# Altium PCB board.PcbDoc
Units mm, origin at the board's own origin, x right, y up, seen from the top; angles counter-clockwise.
Board outline 123 x 60 mm, 4 copper layers (Top Layer, Mid Layer 1, Mid Layer 2, Bottom Layer), stack 1.17 mm thick; 90 components, 58 nets, 304 pads, 97 vias.
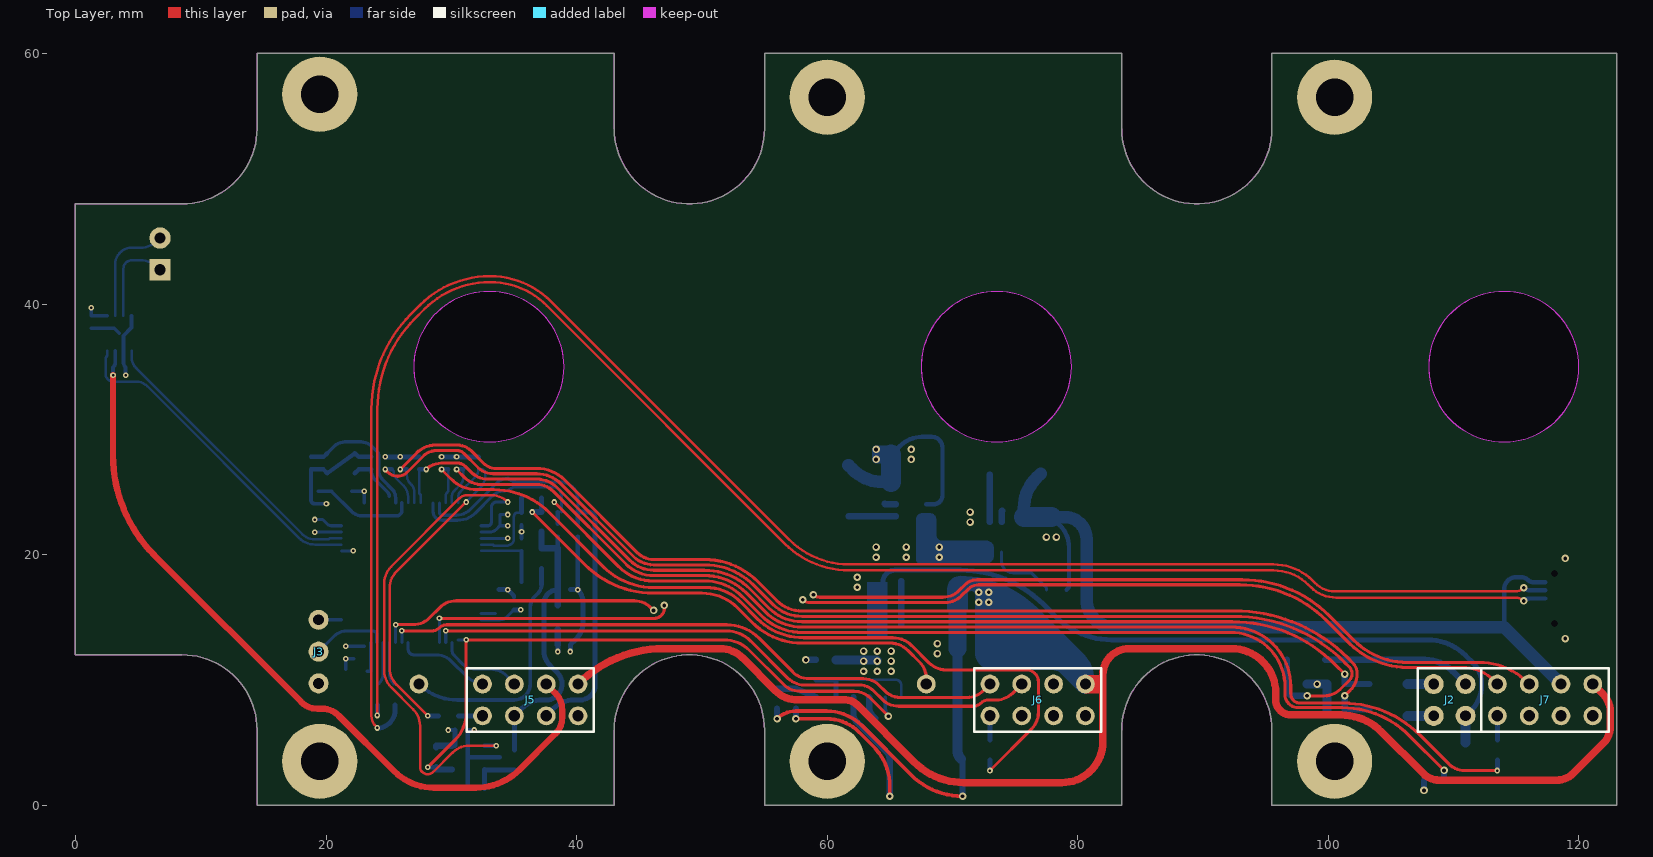
[diagram p0: Top Layer view]
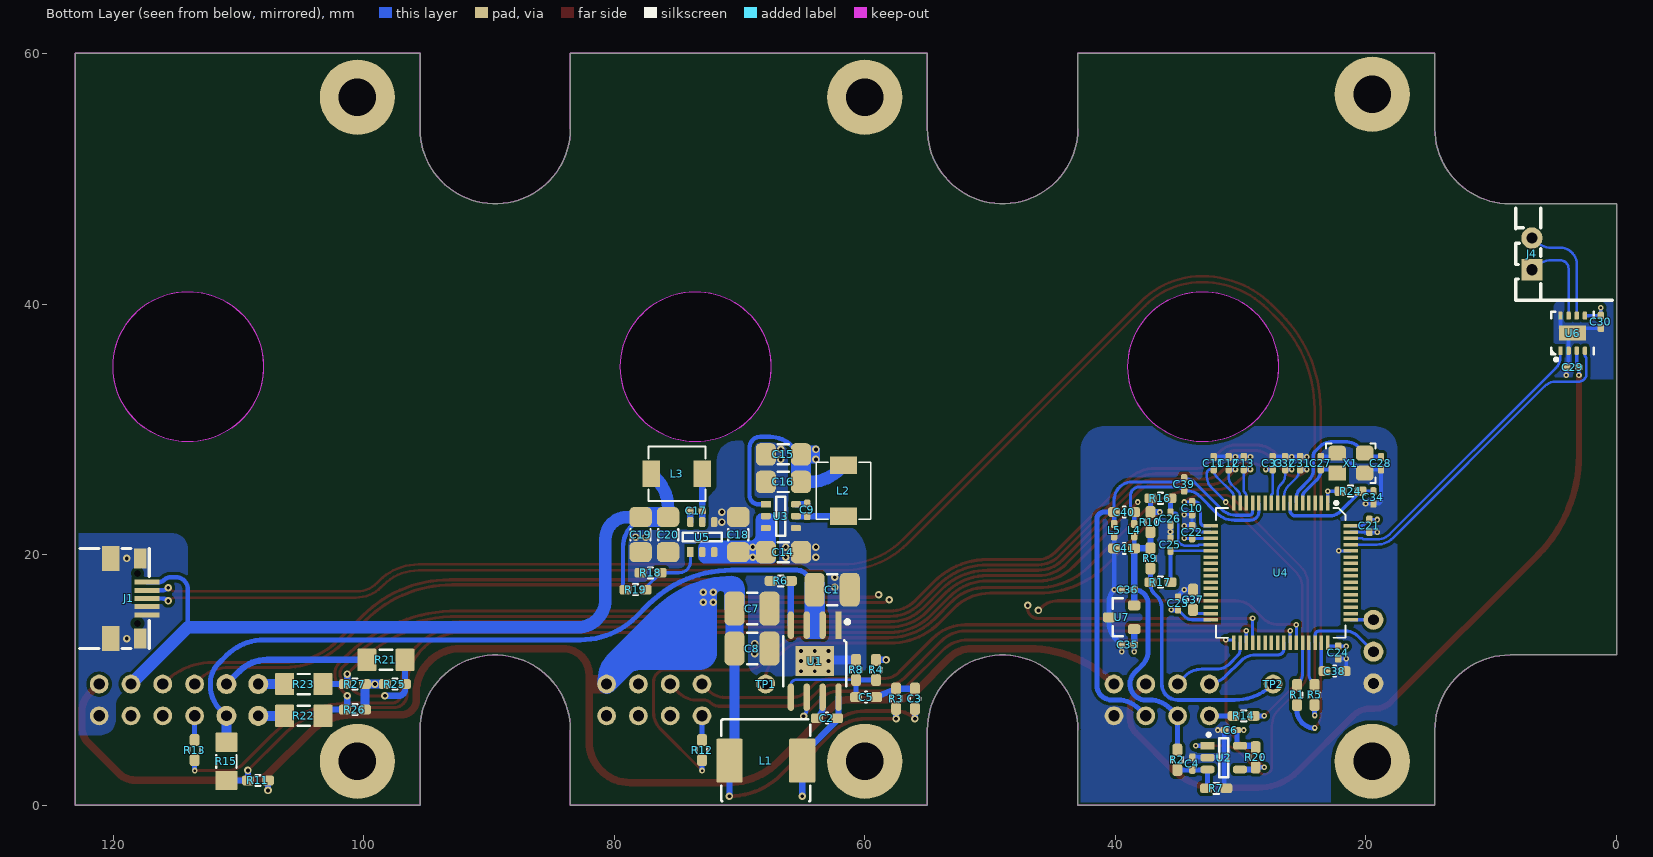
[diagram p1: Bottom Layer view, seen from below]
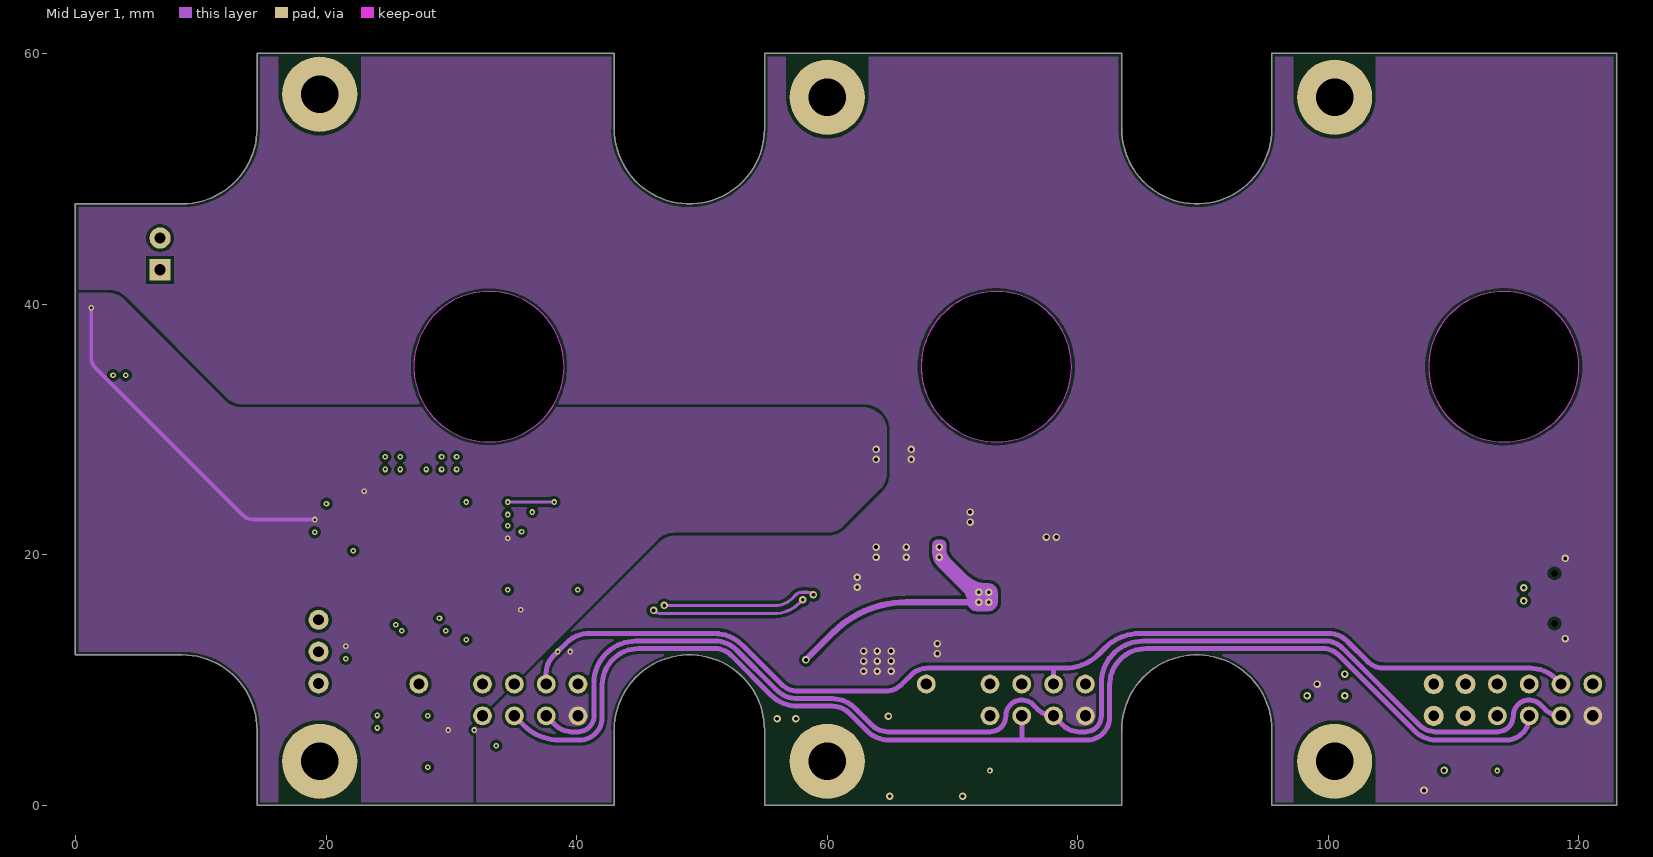
[diagram p2: Mid Layer 1]
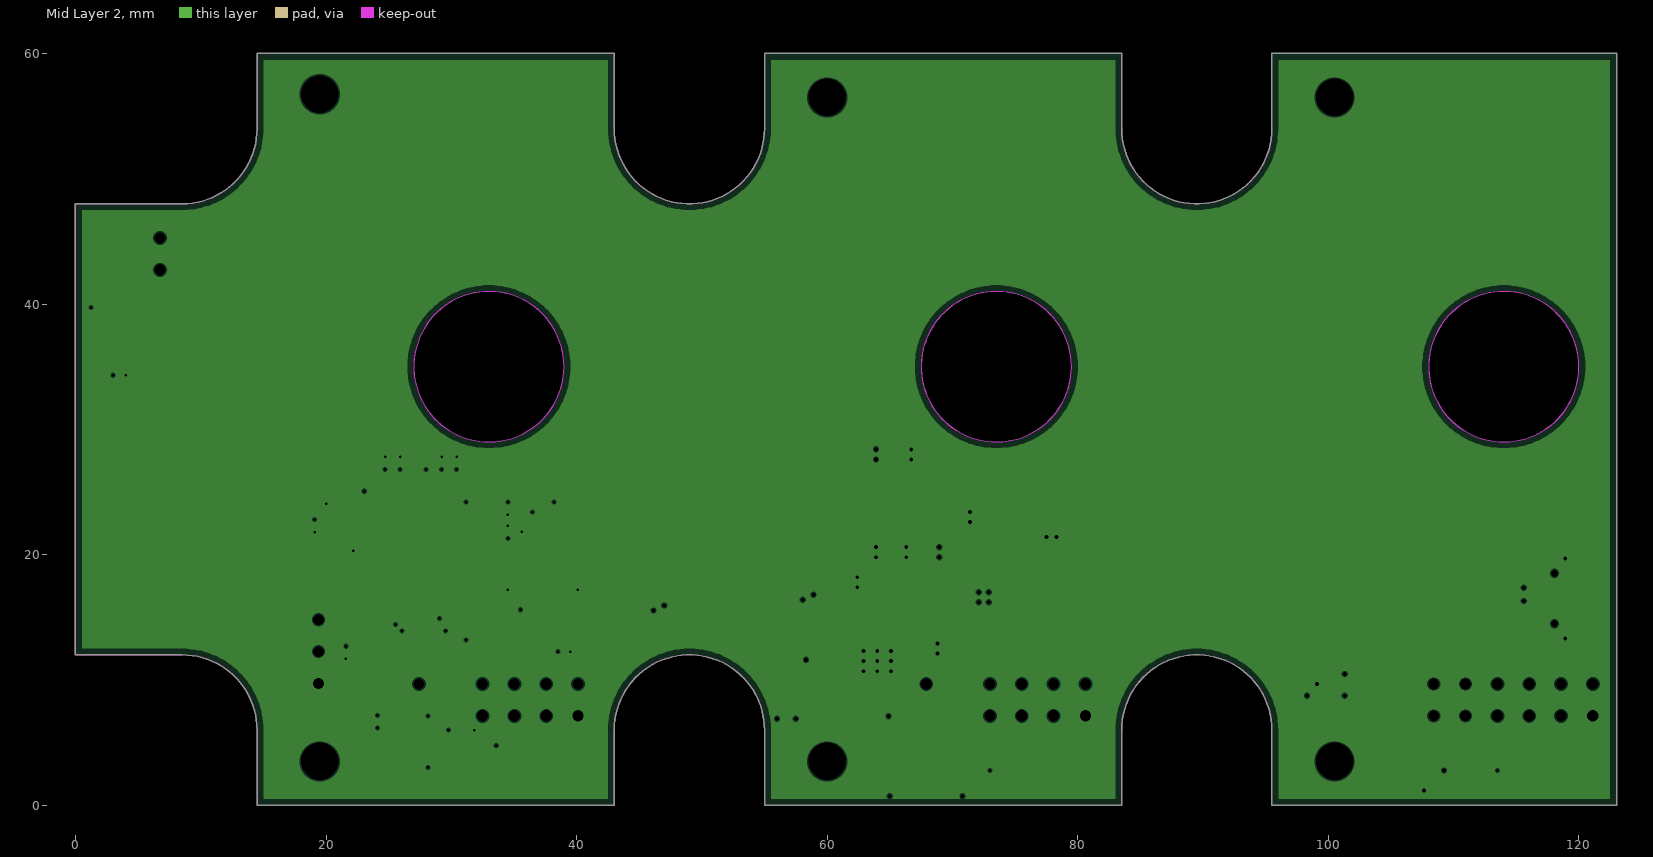
[diagram p3: Mid Layer 2, clearances drawn from the general rule]
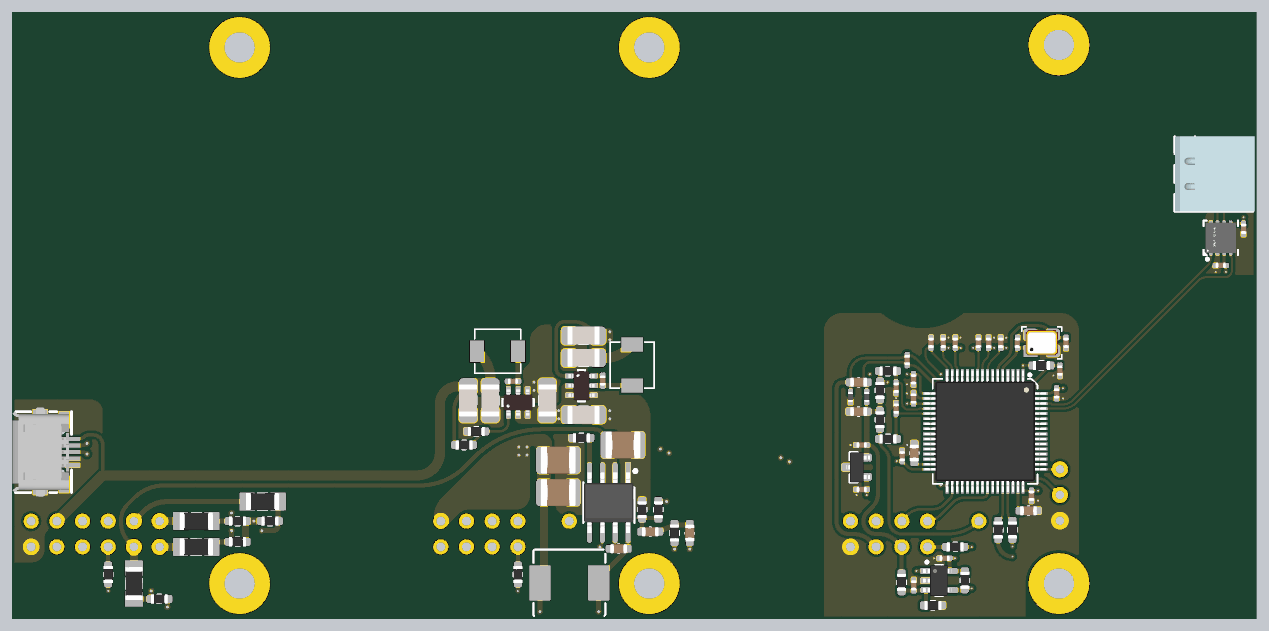
[diagram p4: 3D render of the assembled board from below, using the file's embedded part models]

## Layer stack, top to bottom
Top Solder: solder mask 0.0127, Solder Resist, Dk 3.8
Top Layer: signal copper 0.035
Dielectric 1: prepreg 0.1, 2313, Dk 4.05
Mid Layer 1: signal copper 0.0175
Core: core 0.865, FR-4, Dk 4.5
Mid Layer 2: plane copper 0.0175, net GND
Dielectric 2: prepreg 0.1, 2313, Dk 4.05
Bottom Layer: signal copper 0.035
Bottom Solder: solder mask 0.0127, Solder Resist, Dk 3.8

## Board outline
14.5,6 ccw(c8.5,6) 8.5,12 0,12 0,48 8.5,48 ccw(c8.5,54) 14.5,54 14.5,60 43,60 43,54 ccw(c49,54) 55,54 55,60 83.5,60 83.5,54 ccw(c89.5,54) 95.5,54 95.5,60 123,60 123,0 95.5,0 95.5,6 ccw(c89.5,6) 83.5,6 83.5,0 55,0 55,6 ccw(c49,6) 43,6 43,0 14.5,0
cut-out: 114,41 ccw(c114,35) 108,35 ccw(c114,35) 114,29 ccw(c114,35) 120,35 ccw(c114,35)
cut-out: 73.5,41 ccw(c73.5,35) 67.5,35 ccw(c73.5,35) 73.5,29 ccw(c73.5,35) 79.5,35 ccw(c73.5,35)
cut-out: 33,41 ccw(c33,35) 27,35 ccw(c33,35) 33,29 ccw(c33,35) 39,35 ccw(c33,35)

## Design rules (kind name [scope] priority, off if disabled: settings)
BoardOutlineClearance [All] p1: gap=0.2 ignorepadtopadclearanceinfootprint=FALSE
Clearance [All] p1: gap=0.25 ignorepadtopadclearanceinfootprint=FALSE except(0.102: Arc-Arc Arc-Track Arc-SMDPad Arc-THPad Arc-Text Track-Track Track-SMDPad Track-THPad Track-Text SMDPad-SMDPad SMDPad-THPad SMDPad-Text THPad-THPad THPad-Text Fill-Text Poly-Text Region-Text Text-Text; 0.127: Arc-Via Track-Via SMDPad-Via THPad-Via Via-Via Via-Text)
ComponentClearance [HasFootprint('SWD') or HasFootprint('HDR-2X2')] p1: gap=-1 collisioncheckmode=3 verticalgap=2540 showdistances=TRUE
ComponentClearance ComponentClearance_1 [All] p2: gap=0.4 collisioncheckmode=3 verticalgap=0.102 showdistances=TRUE
DiffPairsRouting [All] p1: maxlimit=0.102 minlimit=0.102 mostfreqgap=0.102 toplayer_minwidth=0.102 toplayer_maxwidth=1816.048 toplayer_prefwidth=0.102 midlayer1_minwidth=0.102 midlayer1_maxwidth=1816.048 midlayer1_prefwidth=0.102 bottomlayer_minwidth=0.102 bottomlayer_maxwidth=1816.048 bottomlayer_prefwidth=0.102 maxuncoupledlength=12.7
Height [All] p1: minheight=0 maxheight=1816.048 prefheight=12.7
HoleSize [All] p1: absolutevalues=TRUE maxlimit=6.3 minlimit=0.2 maxpercent=80.000 minpercent=20.000
HoleToHoleClearance [All] p1: gap=0.25 allowstackedmicrovias=FALSE
MinimumAnnularRing [All] p1: minimumring=0.076
MinimumSolderMaskSliver [All] p1: minsoldermaskwidth=0
PlaneClearance [All] p1: clearance=0.102
PlaneConnect PlaneConnectPowerPads [InPadClass('PowerPads')] p1: planeconnectstyle=Direct reliefexpansion=0.508 reliefentries=4 reliefconductorwidth=0.254 reliefairgap=0.254
PlaneConnect [All] p2: planeconnectstyle=Direct reliefexpansion=0.3 reliefentries=4 reliefconductorwidth=0.102 reliefairgap=0.102
PolygonConnect PolygonConnectPowerPads [All vs (InPadClass('PowerPads'))] p1: connectstyle=Direct reliefconductorwidth=0.254 reliefentries=4 polygonreliefangle="90 Angle" airgapwidth=0.254
PolygonConnect [All] p2: connectstyle=Direct reliefconductorwidth=0.102 reliefentries=4 polygonreliefangle="90 Angle" airgapwidth=0.102
RoutingVias [All] p1: holewidth=0.2 width=0.45 viastyle="Through Hole" minholewidth=0.2 minwidth=0.45 maxholewidth=6.3 maxwidth=6.55
SilkToSilkClearance [All] p1: silktosilkclearance=0
SilkToSolderMaskClearance [IsPad] p1: minsilkscreentomaskgap=0.102 clearancetoexposedcopper=TRUE
SolderMaskExpansion [All] p1: expansion=0.075 istentingtop=FALSE
Width [All] p1: maxlimit=1816.048 minlimit=0.102 preferedwidth=0.102
20 further rules are at their usual default settings.

## Classes and differential pairs
net class R27_Nets: GND NetC33_1
net class C33_Nets: GND NetC33_1
net class C27_Nets: GND NetC27_2
net class R25_Nets: GND NetC31_1
net class C37_Nets: GND NetC37_2
net class C31_Nets: GND NetC31_1
net class U5_Nets: 15V GND NetC17_1 NetC17_2 NetR18_1
net class U3_Nets: 3V3 15V GND NetC9_1 NetC9_2
net class R17_Nets: NetC25_2 NetR9_1
net class R13_Nets: NetC12_1 W_Iout
net class R10_Nets: 3V3_REF NetR10_1
net class R9_Nets: 3V3_REF NetR9_1
net class R4_Nets: 15V NetC5_1
net class R2_Nets: 3V3_REF NetC4_2
net class L4_Nets: 3V3_REF NetC39_2
net class L3_Nets: 5V NetC17_2
net class J4_Nets: NetJ4_1 NetJ4_2
net class C40_Nets: AGND NetC39_2
net class C39_Nets: AGND NetC39_2
net class C38_Nets: GND NetC38_2
net class C41_Nets: 3V3_REF GND
net class C30_Nets: 3V3 GND
net class C13_Nets: GND NetC13_1
net class C12_Nets: GND NetC12_1
net class C11_Nets: GND NetC11_1
net class C6_Nets: 3V3 GND
net class C5_Nets: NetC3_1 NetC5_1
net class C28_Nets: GND NetC28_2
net class TP1_Nets: NetR10_1
net class R22_Nets: NetC32_1 V
net class R18_Nets: GND NetR18_1
net class C36_Nets: 3V3_REF GND
net class C21_Nets: 3V3 GND
net class R8_Nets: GND NetC5_1
net class C29_Nets: 5V GND
net class C26_Nets: GND NetC26_2
net class C14_Nets: 15V GND
net class C10_Nets: GND VB_SNS
net class C4_Nets: GND NetC4_2
net class J2_Nets: NetJ?_1 NetJ?_2 NetJ?_3 NetJ?_4 U V Vb W
net class U1_Nets: BREAK GND NetC2_1 NetC2_2 NetC5_1 NetR6_1 Vb
net class C32_Nets: GND NetC32_1
net class R24_Nets: 3V3 NetC34_2
net class R3_Nets: NetC2_2 NetC3_1
net class L2_Nets: 3V3 NetC9_2
net class J1_Nets: 5V GND NetJ1_2 NetJ1_3
net class R26_Nets: GND NetC32_1
net class C25_Nets: GND NetC25_2
net class C22_Nets: 3V3 GND
net class C9_Nets: NetC9_1 NetC9_2
net class C1_Nets: GND Vb
net class U2_Nets: 3V3 BREAK GND NetC4_2 VB_SNS
net class TP2_Nets: NetR9_1
net class R21_Nets: NetC31_1 U
net class R19_Nets: 5V NetR18_1
net class R16_Nets: NetC26_2 NetR10_1
net class R14_Nets: NetC11_1 U_Iout
net class R20_Nets: 3V3 BREAK
net class R12_Nets: NetC13_1 V_Iout
net class R15_Nets: Vb VB_SNS
net class R23_Nets: NetC33_1 W
net class R11_Nets: GND VB_SNS
net class R7_Nets: GND NetC4_2
net class R5_Nets: DP NetJ1_3
net class R1_Nets: DM NetJ1_2
net class L5_Nets: AGND GND
net class L1_Nets: 15V NetC2_2
net class C15_Nets: 3V3 GND
net class C20_Nets: 5V GND
net class C23_Nets: 3V3 GND
net class C17_Nets: NetC17_1 NetC17_2
net class C16_Nets: 3V3 GND
net class C7_Nets: 15V GND
net class C8_Nets: 15V GND
net class U7_Nets: 3V3_REF 5V GND
net class C34_Nets: GND NetC34_2
net class U6_Nets: 3V3 5V CAN_RX CAN_TX GND NetJ4_1 NetJ4_2
net class C18_Nets: 15V GND
net class C35_Nets: 5V GND
net class X1_Nets: GND NetC27_2 NetC28_2
net class U4_Nets: 3V3 AGND BREAK CAN_RX CAN_TX DM DP GND NetC11_1 NetC12_1 NetC13_1 NetC25_2 NetC26_2 NetC27_2 NetC28_2 NetC31_1 NetC32_1 NetC33_1 NetC34_2 NetC37_2 NetC38_2 NetC39_2 NetU1_2 NetU1_3 NetU1_4 NetU1_7 NetU1_8 NetU1_9 NetU1_10 NetU1_11 NetU1_12 NetU1_13 NetU1_14 NetU1_15 NetU1_16 NetU1_17 NetU1_20 NetU1_21 NetU1_22 NetU1_23 NetU1_24 NetU1_25 NetU1_26 NetU1_27 NetU1_28 NetU1_29 NetU1_30 NetU1_33 NetU1_34 NetU1_35 NetU1_36 NetU1_37 NetU1_38 NetU1_39 NetU1_40 NetU1_44 NetU1_45 NetU1_46 NetU1_49 NetU1_50 NetU1_51 NetU1_52 NetU1_53 NetU1_54 NetU1_55 NetU1_56 NetU1_57 NetU1_58 NetU1_59 NetU1_61 NetU1_62 SWCLK SWDIO U_H U_L V_H V_L VB_SNS W_H W_L
net class J3_Nets: GND SWCLK SWDIO
net class C24_Nets: 3V3 GND
net class R6_Nets: GND NetR6_1
net class C3_Nets: 15V NetC3_1
net class C2_Nets: NetC2_1 NetC2_2
net class C19_Nets: 5V GND
net class J7_Nets: 3V3_REF 5V 15V AGND GND W_H W_Iout W_L
net class J6_Nets: 3V3_REF 5V 15V AGND GND V_H V_Iout V_L
net class J5_Nets: 3V3_REF 5V 15V AGND GND U_H U_Iout U_L

## Components (designator, comment, footprint, x,y, rotation, side; value= is the part's Value field where it differs from the comment)
C1 "2u2" C1210 62.6,17.2 r0 bottom
C2 "2.2nF" C0603 63.025,6.944 r180 bottom
C3 "2n2" C0603 56,8.5 r270 bottom
C4 "100nF" C0402 33.85,3.325 r270 bottom
C5 "56pF" C0603 59.9,8.625 r180 bottom
C6 "100nF" C0402 30.8,6 r180 bottom
C7 "22u" C1210 69,15.7 r0 bottom
C8 "22u" C1210 69,12.5 r0 bottom
C9 "100nF" C0402 64.6,23.572 r270 bottom
C10 "100pF" C0402 33.875,23.7 r270 bottom
C11 "100pF" C0402 32.151,27.3 r90 bottom
C12 "100pF" C0402 30.951,27.3 r90 bottom
C13 "100pF" C0402 29.751,27.3 r90 bottom
C14 "10uF" C1206 66.5,20.2 r0 bottom
C15 "10uF" C1206 66.5,28 r180 bottom
C16 "10uF" C1206 66.5,25.8 r180 bottom
C17 "100nF" C0402 73.472,23.5 r180 bottom
C18 "10uF" C1206 70.1,21.6 r270 bottom
C19 "10uF" C1206 77.9,21.6 r90 bottom
C20 "10uF" C1206 75.7,21.6 r90 bottom
C21 "100nF" C0402 19.726,22.3 r90 bottom
C22 "100nF" C0402 33.875,21.8 r270 bottom
C23 "100nF" C0402 35,16.1 r270 bottom
C24 "100nF" C0402 22.21,12.188 r90 bottom
C25 "100nF" C0402 35.6,20.8 r270 bottom
C26 "100nF" C0402 35.6,22.86 r90 bottom
C27 "18pF" C0402 23.6,27.3 r270 bottom
C28 "18pF" C0402 18.8,27.3 r90 bottom
C29 "100nF" C0402 3.5,34.954 r180 bottom
C30 "100nF" C0402 1.25,38.575 r90 bottom
C31 "100pF" C0402 25.25,27.3 r90 bottom
C32 "100pF" C0402 26.45,27.3 r90 bottom
C33 "100pF" C0402 27.45,27.3 r90 bottom
C34 "100nF" C0402 19.4,24.561 r90 bottom
C35 "100nF" C0402 39,12.8 r180 bottom
C36 "100nF" C0402 39,17.2 r180 bottom
C37 "2.2uF" C0603 33.8,16.4 r270 bottom
C38 "2.2uF" C0603 22.5,10.7 r0 bottom
C39 "100nF" C0402 34.51,25.6 r270 bottom
C40 "1uF" C0603 39.3,23.4 r180 bottom
C41 "1uF" C0603 39.3,20.5 r180 bottom
J1 "MICROQTJ" MICRO-USB-SMD_MICROQTJ 118.75,16.5 r270 bottom
J2 "HDR2X2" HDR-2X2 109.68,8.4 r0 top
J3 "SWD" SWD 19.4,12.26 r0 top
J4 "CAN" CONN-TH_22-05-7025 6.75,44 r270 bottom
J5 "2x4" HDR-2X4 36.3,8.4 r90 top locked
J6 "2x4" HDR-2X4 76.8,8.4 r90 top locked
J7 "2x4" HDR-2X4 117.3,8.4 r90 top locked
L1 "68uH" L0605-POWER 67.9,3.56 r180 bottom
L2 "4.7uH" IND-SMD_L4.4-W4.2 61.7,25.1 r270 bottom
L3 "4.7uH" IND-SMD_L4.4-W4.2 75,26.45 r180 bottom
L4 "BEAD" L0402 38.5,21.95 r90 bottom
L5 "BEAD" L0402 40.1,21.95 r90 bottom
R1 "22R" R0603 25.501,8.8 r270 bottom
R2 "1k6" R0603 35.05,3.625 r270 bottom
R3 "470k" R0603 57.5,8.5 r90 bottom
R4 "560k" R0603 59.1,10.8 r270 bottom
R5 "22R" R0603 24.1,8.8 r270 bottom
R6 "100k" R0603 66.705,17.9 r0 bottom
R7 "1k6" R0603 31.95,1.35 r180 bottom
R8 "51k" R0603 60.7,10.8 r90 bottom
R9 "10k" R0603 37.2,19.7 r90 bottom
R10 "10k" R0603 37.2,22.6 r270 bottom
R11 "1k6" R0603 108.434,1.976 r180 bottom
R12 "4k7" R0603 72.99,4.4 r270 bottom
R13 "4k7" R0603 113.49,4.4 r270 bottom
R14 "4k7" R0603 29.76,7.13 r180 bottom
R15 "47k" R1206 110.95,3.5 r270 bottom
R16 "10k" R0603 36.4,24.5 r0 bottom
R17 "10k" R0603 36.4,17.8 r0 bottom
R18 "4k7" R0603 77.1,18.55 r0 bottom
R19 "3k" R0603 78.3,17.2 r180 bottom
R20 "4k7" R0603 28.8,3.825 r90 bottom
R21 "47k" R1206 98.224,11.6 r0 bottom
R22 "47k" R1206 104.78,7.13 r0 bottom
R23 "47k" R1206 104.78,9.67 r0 bottom
R24 "4k7" R0603 21.225,25.061 r180 bottom
R25 "1k6" R0603 97.5,9.67 r0 bottom
R26 "1k6" R0603 100.7,7.63 r180 bottom
R27 "1k6" R0603 100.7,9.67 r180 bottom
TP1 "" TP2030_SMD 67.91,9.67 r90 bottom
TP2 "" TP2030_SMD 27.41,9.67 r90 bottom
U1 "LM5164" PowerSOIC-8 64,11.5 r0 bottom
U2 "LMV331TP" SOT-23-5 31.35,3.8 r0 bottom
U3 "AP63203WU-7" SOT-23-6 66.7,23.072 r0 bottom
U4 "STM32F405RGT6" LQFP-64 26.8,18.55 r270 bottom
U5 "AP63203WU-7" SOT-23-6 72.972,21.4 r270 bottom
U6 "SIT1042QTK/3" DFN8_3X3_P065 3.5,37.675 r90 bottom
U7 "NCP51460SN33T1G" SOT-23 39.5,15 r180 bottom
X1 "12MHZ" CRYSTAL_3.2x2.5mm 21.2,27.3 r180 bottom

## Footprints (in the part's own frame and the unit in brackets; to place one, negate y for a bottom-side part, rotate by r counter-clockwise, add the part's x,y. Pads: shape width x height; smd on the part's side, far side on the other; paste and mask are expansions set on the pad)
C0402 [mm] "Chip Capacitor Body"
  rrect50% 0.635x0.508 smd mask+0.05: 1(-0.5,0) 2(0.5,0)
  body extent -0.52,-0.27 0.53,0.28, height 0.55
C0603 [mil] "Chip Capacitor"
  rrect50% 38x31 smd mask+1.97: 1(-31.5,0) 2(31.5,0)
  silkscreen extent -3,-17 3,17, body extent -33,-18 33,18, height 35
C1206 [mm] "Chip Capacitor"
  rrect50% 1.6x1.8 smd: 1(-1.4,0) 2(1.4,0)
  silkscreen extent -0.45,-0.8 0.45,0.8, body extent -1.6,-0.88 1.6,0.92, height 1.6
C1210 [mm] "Chip Capacitor"
  rrect50% 1.6x2.7 smd mask+0.05: 1(-1.4,0) 2(1.4,0)
  silkscreen extent -0.4,-1.25 0.4,1.25, body extent -1.75,-1.35 1.75,1.35, height 1.8
CONN-TH_22-05-7025 [mm]
  rect 1.7x1.7 hole 0.9: 1(1.27,0)
  round 1.7 hole 0.9: 2(-1.27,0)
  silkscreen extent -3.67,-1.3 3.7,6.42, body extent -3.7,-1.3 3.7,6.6, height 4.95
CRYSTAL_3.2x2.5mm [mm]
  rect 1.4x1.2 smd mask+0.05: 1(-1.1,-0.8)
  rrect50% 1.4x1.2 smd mask+0.05: 2(-1.1,0.8) 3(1.1,0.8) 4(1.1,-0.8)
  silkscreen extent -1.97,-1.57 1.97,1.57, body extent -1.6,-1.25 1.6,1.25, height 0.82
DFN8_3X3_P065 [mm]
  rect 0.65x0.35 smd mask+0.05: 1(-1.4,0.975)
  rrect50% 0.65x0.35 smd mask+0.05: 2(-1.4,0.325) 3(-1.4,-0.325) 4(-1.4,-0.975) 5(1.4,-0.975) 6(1.4,-0.325) 7(1.4,0.325) 8(1.4,0.975)
  rect 1.2x2.15 smd mask+0.05: 9(0,0)
  silkscreen extent -2.22,-1.7 1.7,1.7, body extent -1.51,-1.5 1.51,1.5, height 0.8
HDR-2X2 [mm]
  round 1.6 hole 0.85: 1(-1.27,1.27) 2(1.27,1.27) 3(-1.27,-1.27) 4(1.27,-1.27)
  silkscreen extent -2.54,-2.54 2.54,2.54
HDR-2X4 [mm]
  round 1.5 hole 0.9: 1(-1.27,3.81) 2(1.27,3.81) 3(-1.27,1.27) 4(1.27,1.27) 5(-1.27,-1.27) 6(1.27,-1.27) 7(-1.27,-3.81) 8(1.27,-3.81)
  silkscreen extent -2.54,-5.08 2.54,5.08
IND-SMD_L4.4-W4.2 [mm]
  rect 1.4x2.12 smd: 1(2.028,0) 2(-2.028,0)
  silkscreen extent -2.28,-2.18 2.28,2.18, body extent -2.28,-2.18 2.28,2.18, height 1.8
L0402 [mm] "Chip Inductor"
  rrect50% 0.635x0.508 smd mask+0.05: 1(-0.5,0) 2(0.5,0)
  body extent -0.5,-0.25 0.5,0.25, height 0.5
L0605-POWER [mm]
  rrect10% 2.1x3.5 smd paste+0 mask+0.05: 1(2.9,0) 2(-2.9,0)
  Top Layer pour cut-out: -1.9,-3.122 -1.886,-3.19 -1.848,-3.248 -1.79,-3.286 -1.722,-3.3 -1.722,-3.3 1.722,-3.3 1.79,-3.286 1.848,-3.248 1.886,-3.19 1.9,-3.122 1.9,-3.122 1.9,3.122 1.886,3.19 1.848,3.248 1.79,3.286 1.722,3.3 1.722,3.3 -1.722,3.3 -1.79,3.286 -1.848,3.248 -1.886,3.19 -1.9,3.122 -1.9,3.122
  silkscreen extent -3.55,-3.26 3.55,3.3, body extent -3.55,-3.3 3.55,3.3, height 5
LQFP-64 [mil]
  rect 46x11 smd mask+0.98: 1(-219.5,147.64) 2(-219.5,127.95) 3(-219.5,108.27) 4(-219.5,88.58) 5(-219.5,68.9) 6(-219.5,49.21) 7(-219.5,29.53) 8(-219.5,9.84) 9(-219.5,-9.84) 10(-219.5,-29.53) 11(-219.5,-49.21) 12(-219.5,-68.9) 13(-219.5,-88.58) 14(-219.5,-108.27) 15(-219.5,-127.95) 16(-219.5,-147.64) 33(219.5,-147.64) 34(219.5,-127.95) 35(219.5,-108.27) 36(219.5,-88.58) 37(219.5,-68.9) 38(219.5,-49.21) 39(219.5,-29.53) 40(219.5,-9.84) 41(219.5,9.84) 42(219.5,29.53) 43(219.5,49.21) 44(219.5,68.9) 45(219.5,88.58) 46(219.5,108.27) 47(219.5,127.95) 48(219.5,147.64)
  rect 11x46 smd mask+0.98: 17(-147.64,-219.5) 18(-127.95,-219.5) 19(-108.27,-219.5) 20(-88.58,-219.5) 21(-68.9,-219.5) 22(-49.21,-219.5) 23(-29.53,-219.5) 24(-9.84,-219.5) 25(9.84,-219.5) 26(29.53,-219.5) 27(49.21,-219.5) 28(68.9,-219.5) 29(88.58,-219.5) 30(108.27,-219.5) 31(127.95,-219.5) 32(147.64,-219.5) 49(147.64,219.5) 50(127.95,219.5) 51(108.27,219.5) 52(88.58,219.5) 53(68.9,219.5) 54(49.21,219.5) 55(29.53,219.5) 56(9.84,219.5) 57(-9.84,219.5) 58(-29.53,219.5) 59(-49.21,219.5) 60(-68.9,219.5) 61(-88.58,219.5) 62(-108.27,219.5) 63(-127.95,219.5) 64(-147.64,219.5)
  silkscreen extent -224,-204 204,204, body extent -236,-236 236,236, height 59
MICRO-USB-SMD_MICROQTJ [mm]
  rect 0.4x2 smd mask+0.05: 1(-1.3,1.452) 2(-0.65,1.452) 3(0,1.452) 4(0.65,1.452) 5(1.3,1.452)
  rect 1.6x1 smd: 6(-3.2,0.902) 9(3.2,0.902)
  rect 2x1.4 smd: 7(-3.2,-1.452) 8(3.2,-1.452)
  round 0 hole 0.55 unplated: ""(-2,0.698) ""(2,0.698)
  silkscreen extent -4,-3.92 4,1.63, body extent -4.4,-4.2 4.4,1.4, height 2.72
PowerSOIC-8 [mm]
  rect 0.5x2.2 smd mask+0.05: 1(-1.905,-2.875)
  oval 0.5x2.2 smd mask+0.05: 2(-0.635,-2.875) 3(0.635,-2.875) 4(1.905,-2.875) 5(1.905,2.875) 6(0.635,2.875) 7(-0.635,2.875) 8(-1.905,2.875)
  rect 3.1x2.4 smd mask+0.05: 9(0,0)
  silkscreen extent -2.67,-3.17 2.52,2, body extent -2.45,-3 2.45,3, height 1.68
R0603 [mil] "Chip Resistor; Body 1.6 x 0.8 mm (LxW typ)"
  rrect50% 38x31 smd mask+1.97: 1(-31.5,0) 2(31.5,0)
  silkscreen extent -8,-17 8,17, body extent -33,-18 33,18, height 22
R1206 [mil] "Chip Resistor"
  rrect10% 60x70 smd mask+1.97: 1(-60,0) 2(60,0)
  silkscreen extent -20,-31 20,31, body extent -65,-33 65,33, height 26
SOT-23 [mm]
  rrect50% 1x0.8 smd mask+0.05: 1(1,-0.95) 2(1,0.95) 3(-1,0)
  silkscreen extent -0.7,-1.5 0.1,1.5, body extent -1.27,-1.5 1.33,1.5, height 1.1
SOT-23-5 [mm]
  rect 1.1x0.6 smd mask+0.05: 1(1.3,-0.95)
  rrect50% 1.1x0.6 smd mask+0.05: 2(1.3,0) 3(1.3,0.95) 4(-1.3,0.95) 5(-1.3,-0.95)
  silkscreen extent -0.35,-1.95 1.33,1.55, body extent -1.6,-1.55 1.6,1.55, height 1.45
SOT-23-6 [mm]
  rect 0.8x0.5 smd mask+0.05: 1(1.2,-0.95)
  rrect50% 0.8x0.5 smd mask+0.05: 2(1.2,0) 3(1.2,0.95) 4(-1.2,0.95) 5(-1.2,0) 6(-1.2,-0.95)
  silkscreen extent -0.35,-1.55 0.35,1.55, body extent -1.3,-1.45 1.3,1.45, height 1.14
SWD [mm]
  round 1.6 hole 0.85: 1(0,2.54) 2(0,0) 3(0,-2.54)
TP2030_SMD [mm] "TP30_SMD"
  round 1.5 hole 0.9 mask+0.05: 1(0,0)

## Part data
C1: library part CAP, "2.2uF 100V 1210"
C2 C37 C38: library part CAP, "2.2uF 0603"
C3: library part CAP, "2.2nF 0603"
C4 C6 C9 C10 C11 C12 C13 C17 C21 C22 C23 C24 C25 C26 C29 C30 C31 C32 C33 C34 C35 C36 C39: library part CAP, "100nF 0402"
C5: library part CAP, "56pF 0603"
C7 C8: library part CAP, "22u 35V 1210"
C14 C15 C16 C18 C19 C20: library part CAP, "10uF 1206"
C27 C28: library part CAP, "18pF 0402"
C40 C41: library part CAP, "1uF 0603"
J2: library part "Header 2x2"
J3: library part "Header 3"
J4: library part "Header 3", "22057025"
J5 J6 J7: library part "Header 8"
L1: library part SRN3015-100M, "PSPMAA0605H-680M-IGF"
L2 L3: "FXL0420-4R7-M"
L4 L5: library part BLM18AG601SN1D, "BEAD 0402"
R1 R5: library part RES, "22R 0603"
R2 R7 R11 R25 R26 R27: library part RES, "1k6 0603"
R3: library part RES, "470k 0603"
R4: library part RES, "560k 0603"
R6: library part RES, "100k 0603"
R8: library part RES, "51k 0603"
R9 R10 R16 R17: library part RES, "10k 0603"
R12 R13 R14 R18 R20 R24: library part RES, "4k7 0603"
R15 R21 R22 R23: library part RES, "47k 1206"
R19: library part RES, "3k 0603"
TP1 TP2: library part TP_Dup1
U4: library part STM32F405, "STM32 ARM-based 32-bit MCU"
U6: library part LTC2875
X1: library part "CRYSTAL 12MHZ 3.20mm x 2.50mm", "X322512MOB4SI"

## Free pads (board coordinates)
  round 6 hole 3: M(19.5,3.5) M(19.5,56.75) M(60,3.5) M(60,56.5) M(100.5,3.5) M(100.5,56.5)

## Via types
v1: diameter 0.6, hole 0.3, Top Layer to Bottom Layer, tented both sides, 51 vias
v2: diameter 0.45, hole 0.2, Top Layer to Bottom Layer, tented both sides, 46 vias

## Nets (pads, with @x,y where several pads share a name; then routed paths per layer and width w, separated by ;. In a path a pad name is that pad's centre, name@x,y a point inside that pad or via, vN(x,y) a via of type N, cw(c..) or ccw(c..) an arc to the next point about the centre after c; other vN are vias at no path point)
3V3: C6.2 C15.2 C16.2 C21.2 C22.2 C23.2 C24.2 C30.2 L2.2 R20.2 R24.1 U2.5 U3.1 U4.1 U4.19 U4.32 U4.48 U4.64 U6.5 | length 60.6
  Mid Layer 1 w0.3: v2(1.25,39.71) 1.25,35.755 ccw(c2.469,35.755) 1.607,34.893 13.342,23.158 ccw(c14.205,24.02) 14.205,22.8 v2(19.091,22.8)
  Bottom Layer w0.25: v2(19.091,22.8) C21.2 20.031,22.495 ccw(c20.5,22.963) 20.5,22.3 U4.64 ; v2(21.575,12.688) U4.48@23.045,12.688 ; R24.1 v2(23.05,25.061) U4.1 ; U4.32 33.889,14.8 ccw(c33.889,15.552) 34.421,15.02 C23.2 ; U4.19 C22.2 v2(34.51,21.3)
  Bottom Layer w0.3: v2(1.25,39.71) C30.2 U6.5
  Bottom Layer w0.35: v2(29.765,6) C6.2 ; C15.2@65.15,28 65.838,28.688 cw(c67.557,26.968) 67.557,29.4 68.338,29.4 cw(c68.338,28.538) 69.2,28.538 69.2,24.733 cw(c68.489,24.733) 68.489,24.022 U3.1
  Bottom Layer w0.4: U2.5 30.3,4.75 C6.2 ; C23.2 v2(35.535,15.6)
  Bottom Layer w0.5: R20.2 28.8,4.75 U2.5
  Bottom Layer w1: L2.2 62.047,26.781 ccw(c64.415,29.15) 64.415,25.8 C16.2 C16.2@65.15,25.8
  Bottom Layer w1.6: C16.2 C15.2
  other v1: 63.9,27.6 63.9,28.4
3V3_REF: C36.2 C41.2 J5.3 J6.3 J7.3 L4.1 R2.1 R9.2 R10.2 U7.2 | length 124.8
  Mid Layer 1 w0.4: J5.3 35.785,6.375 ccw(c38.622,9.212) 38.622,5.2 40.22,5.2 ccw(c40.22,7.02) 42.04,7.02 42.04,9.387 ; 42.04,9.587 cw(c44.953,9.587) 44.953,12.5 51.032,12.5 cw(c51.032,10.646) 52.343,11.957 55.505,8.795 ccw(c57.665,10.954) 57.665,7.9 60.44,7.9 cw(c60.44,6.046) 61.751,7.357 63.189,5.919 ccw(c64.925,7.654) 64.925,5.2 75.53,5.2 ; J6.3 75.53,5.2 ; 85.453,12.5 ccw(c85.453,9.587) 82.54,9.587 82.54,7.02 cw(c80.72,7.02) 80.72,5.2 75.53,5.2 ; 85.542,12.5 99.54,12.5 cw(c99.54,10.646) 100.851,11.957 106.889,5.919 ccw(c108.625,7.654) 108.625,5.2 114.176,5.2 ccw(c114.176,7.054) 116.03,7.054 J7.3
  Bottom Layer w0.35: C41.2 L4.1
  Bottom Layer w0.4: J5.3 35.605,7.705 cw(c37.283,6.027) 37.283,8.4 37.57,8.4 ccw(c37.57,9.67) 38.468,10.568 37.856,11.18 cw(c38.958,12.281) 37.4,12.281 37.4,16.1 cw(c38.5,16.1) C36.2 ; R2.1 J5.3@35.05,7.11
  Bottom Layer w0.5: R10.2@37.2,21.835 R9.2 C41.2 C36.2 U7.2
5V: C19.2 C20.2 C29.2 C35.2 J1.1 J5.6 J6.6 J7.6 L3.2 R19.1 U6.3 U7.1 | length 222.7
  Top Layer w0.5: v2(3,34.319) 3,27.917 ccw(c14.268,27.917) 6.3,19.95 18.005,8.245 ccw(c19.316,9.557) 19.316,7.702 19.685,7.702 cw(c19.685,5.848) 20.996,7.159 25.45,2.706 ccw(c28.602,5.858) 28.602,1.4 31.956,1.4 ccw(c31.956,6.355) 35.459,2.851 38.305,5.697 ccw(c36.994,7.008) 38.848,7.008 38.848,7.624 ccw(c36.994,7.624) 38.305,8.935 J5.6
  Mid Layer 1 w0.4: J5.6 37.57,10.567 cw(c39.424,10.567) 38.113,11.878 v2(38.5,12.265) 39.199,12.965 cw(c40.975,11.189) 40.975,13.7 51.032,13.7 cw(c51.032,10.646) 53.192,12.805 56.354,9.643 ccw(c57.665,10.954) 57.665,9.1 64.632,9.1 ccw(c64.632,10.954) 65.943,9.643 66.697,10.397 cw(c68.008,9.086) 68.008,10.94 78.07,10.94 ; J6.6 78.07,10.94 ; J7.6 118.139,10.101 ccw(c116.108,8.062) 116.108,10.94 104.428,10.94 cw(c104.428,12.794) 103.117,11.483 101.531,13.069 ccw(c100.008,11.546) 100.008,13.7 84.9,13.7 ccw(c84.9,9.9) 82.213,12.587 81.693,12.067 cw(c78.972,14.788) 78.972,10.94 78.07,10.94
  Bottom Layer w0.3: v2(3,34.319) C29.2 ccw(c2.578,35.377) 3.175,35.377 U6.3
  Bottom Layer w0.35: C19.2 78.588,22.312 cw(c76.868,20.593) 79.3,20.593 79.3,17.4 R19.1 ; 114.04,14.2 114.04,17.253 cw(c114.987,17.253) 114.987,18.2 115.417,18.2 cw(c115.417,17.517) 115.9,18 ccw(c116.382,18.482) 116.382,17.8 J1.1
  Bottom Layer w0.4: v2(38.5,12.265) C35.2
  Bottom Layer w0.5: C35.2 U7.1
  Bottom Layer w1: C20.2 75.7,23.735 cw(c79.05,23.735) 76.681,26.103 L3.2 ; C19.2 78.953,23 cw(c78.953,21.254) 80.699,21.254 80.699,16.42 ccw(c82.919,16.42) 82.919,14.2 114.04,14.2 J7.6
  Bottom Layer w1.6: C20.2 C19.2
15V: C3.2 C7.2 C8.2 C14.2 C18.2 J5.8 J6.8 J7.8 L1.2 R4.1 U3.2 U3.3 U5.2 U5.3 | length 155.8
  Top Layer w0.3: v1(56,6.9) cw(c57.483,5.417) 57.483,7.514 59.956,7.514 cw(c59.956,3.541) 62.766,6.35 66.689,2.427 ccw(c70.8,6.538) v1(70.8,0.724)
  Top Layer w0.6: J5.8 cw(c46.942,2.838) 46.942,12.5 51.448,12.5 cw(c51.448,9.96) 53.244,11.756 55.856,9.144 ccw(c57.652,10.94) 57.652,8.4 61.495,8.4 cw(c61.495,7.181) 62.357,8.043 66.961,3.439 ccw(c70.917,7.395) 70.917,1.8 78.735,1.8 ccw(c78.735,5.065) 82,5.065 82,10.4 cw(c84.1,10.4) 84.1,12.5 92.267,12.5 cw(c92.267,8.967) 95.8,8.967 95.8,8.424 ccw(c97.019,8.424) 97.019,7.205 101.012,7.205 cw(c101.012,2.659) 104.226,5.874 107.557,2.543 ccw(c108.868,3.854) 108.868,2 118.232,2 ccw(c118.232,3.854) 119.543,2.543 121.957,4.957 ccw(c120.646,6.268) 122.5,6.268 122.5,7.482 ccw(c120.573,7.482) 121.936,8.844 J7.8
  Mid Layer 1 w0.5: v1(58.3,11.6) 60.492,13.792 cw(c66.305,7.979) 66.305,16.2 v1(72.1,16.2)
  Bottom Layer w0.5: v1(56,6.9) C3.2 ; v1(58.3,11.6) R4.1 ; v1(70.8,0.724) L1.2
  Bottom Layer w0.8: C8.2 70.4,4.371 ccw(c71.391,4.371) L1.2@70.69,3.67
  Bottom Layer w1.4: C8.2 C7.2
  other v1: 72.9,16.2 72.1,17 72.9,17 68.95,19.8 68.95,20.6
AGND: C39.1 C40.1 J5.5 J6.5 J7.5 L5.2 U4.13 | length 137.3
  Mid Layer 1 w0.4: J5.5 38.297,6.403 ccw(c39.608,7.714) 39.608,5.86 40.11,5.86 ccw(c40.11,7.13) 41.38,7.13 41.38,9.548 ; 41.38,9.748 cw(c44.732,9.748) 44.732,13.1 51.032,13.1 cw(c51.032,10.646) 52.767,12.381 55.93,9.219 ccw(c57.665,10.954) 57.665,8.5 60.44,8.5 cw(c60.44,6.046) 62.176,7.781 63.554,6.403 ccw(c64.865,7.714) 64.865,5.86 72.99,5.86 ccw(c72.99,7.13) 74.26,7.13 cw(c75.53,7.13) 76.428,8.028 76.8,7.656 ccw(c78.07,8.926) J6.5 78.797,6.403 ccw(c80.108,7.714) 80.108,5.86 80.61,5.86 ccw(c80.61,7.13) 81.88,7.13 81.88,9.748 cw(c85.232,9.748) 85.232,13.1 99.789,13.1 cw(c99.789,11.246) 101.1,12.557 107.254,6.403 ccw(c108.565,7.714) 108.565,5.86 113.49,5.86 ccw(c113.49,7.13) 114.76,7.13 cw(c116.03,7.13) 116.928,8.028 117.3,7.656 ccw(c118.57,8.926) J7.5
  Bottom Layer w0.25: U4.13 29.05,23.4 ccw(c29.306,23.4) 29.306,23.144 30.407,23.144 ccw(c30.407,24.682) 31.494,23.594 33.639,25.739 cw(c34.51,24.869) C39.1 ccw(c35.234,26.824) 35.234,25.8 38.658,25.8 cw(c38.658,24.357) 40.1,24.357 C40.1 C40.1@40.1,23.523
  Bottom Layer w0.35: L5.2 C40.1
  Bottom Layer w0.4: J5.5 38.145,7.705 cw(c39.823,6.027) 39.823,8.4 40.3,8.4 ccw(c40.3,9.58) 41.48,9.58 41.48,22.82 ccw(c40.9,22.82) 40.9,23.4 40.223,23.4 cw(c40.223,23.523) C40.1@40.1,23.523
BREAK: R20.1 U1.6 U2.4 U4.33 | length 51.6
  Top Layer w0.25: v2(28.125,3.025) 30.282,5.182 ccw(c28.115,7.348) 31.179,7.348 v2(31.179,13.2) 51.749,13.2 cw(c51.749,10.297) 53.802,12.35 56.508,9.643 ccw(c57.82,10.954) 57.82,9.1 62.119,9.1 cw(c62.119,7.246) 63.43,8.557 v1(64.889,7.098)
  Bottom Layer w0.25: U4.33@30.55,13.2 v2(31.179,13.2)
  Bottom Layer w0.3: U1.6 64.635,7.711 ccw(c65.502,7.711) v1(64.889,7.098)
  Bottom Layer w0.35: v2(28.125,3.025) R20.1
  Bottom Layer w0.5: R20.1 28.8,2.85 U2.4
CAN_RX: U4.61 U6.4 | length 26.3
  Bottom Layer w0.2: U6.4 2.525,35.926 cw(c2.314,35.926) 2.463,35.776 ccw(c2.615,35.624) 2.4,35.624 2.4,34.443 ccw(c3.043,34.443) 3.043,33.8 4.865,33.8 cw(c4.865,32.581) 5.727,33.443 17.835,21.335 ccw(c19.125,22.625) 19.125,20.8 U4.61
CAN_TX: U4.62 U6.1 | length 23.5
  Bottom Layer w0.2: U6.1 4.475,35.77 ccw(c5.694,35.77) 4.832,34.908 18.114,21.626 ccw(c19.113,22.625) 19.113,21.213 20.13,21.213 ccw(c20.13,21.363) 20.236,21.257 cw(c20.342,21.15) 20.342,21.3 U4.62
DM: R1.1 U4.44 | length 3.4
  Bottom Layer w0.25: U4.44 25.05,10.555 ccw(c26.27,10.555) R1.1@25.407,9.693
DP: R5.1 U4.45 | length 3.4
  Bottom Layer w0.25: R5.1@24.193,9.693 ccw(c23.331,10.555) 24.55,10.555 U4.45
GND: C1.1 C4.1 C6.1 C7.1 C8.1 C10.2 C11.2 C12.2 C13.2 C14.1 C15.1 C16.1 C18.1 C19.1 C20.1 C21.1 C22.1 C23.1 C24.1 C25.1 C26.1 C27.1 C28.1 C29.1 C30.1 C31.2 C32.2 C33.2 C34.1 C35.1 C36.1 C37.1 C38.1 C41.1 J1.4 J1.5 J1.6 J1.7 J1.8 J1.9 J3.3 J5.7 J6.7 J7.7 L5.1 R6.2 R7.2 R8.2 R11.2 R18.2 R25.2 R26.2 R27.2 U1.1 U1.9 U2.2 U3.4 U4.18 U4.60 U4.63 U5.4 U6.2 U6.8 U6.9 U7.3 X1.2 X1.4 | length 59.4
  Bottom Layer w0.25: v2(19.091,21.8) C21.1 U4.63 ; U4.60 v2(22.16,20.3) ; C38.1@21.575,10.825 v2(21.575,11.688) C24.1 ; U4.18 33.101,21.8 ccw(c33.101,22.463) 33.569,21.995 C22.1 ; v2(34.51,22.3) C22.1 ; v2(34.51,23.2) C10.2 C22.1
  Bottom Layer w0.3: C30.1 3.1,38.075 U6.9 ; v2(4,34.319) C29.1 cw(c4.422,35.377) 3.825,35.377 U6.2 3.825,37.475 4.475,38.125 U6.8 ; C28.1 18.8,24.361 ccw(c19.1,24.361) 19.1,24.061 v2(20.035,24.061)
  Bottom Layer w0.35: C28.1 19.8,26.8 X1.4 X1.2 22.6,27.8 C27.1 ; R7.2 31.3,1.5 31.3,3.825 ; v2(31.835,6) C6.1 31.3,3.825 ; C4.1 31.3,3.825 ; v2(34.51,17.2) 34.922,16.788 cw(c34.734,16.6) C23.1 ; C25.1 v2(35.6,21.835) C26.1 ; v2(40.1,17.2) C41.1 L5.1
  Bottom Layer w0.4: v2(24.715,27.8) C31.2 v2(25.915,27.8) C32.2 C33.2 ; v2(29.216,27.8) C13.2 v2(30.416,27.8) C12.2 C11.2 ; C37.1 v2(34.51,17.2) ; v2(39.5,12.265) C35.1 39.957,13.257 ccw(c38.646,14.568) 40.5,14.568 U7.3 40.5,16.235 ccw(c39.135,16.235) v2(40.1,17.2) C36.1
  Bottom Layer w0.5: v1(107.634,1.176) R11.2
  Bottom Layer w0.7: R8.2 63.9,11.6 cw(c63.9,11.5) v1(64,11.5) ; R25.2 v1(99.1,9.67) R27.2 R26.2
  other v1: 62.9,10.7 64,10.7 65.1,10.7 62.9,11.5 65.1,11.5 68.8,12.1 62.9,12.3 64,12.3 65.1,12.3 68.8,12.9 118.9,13.3 62.4,17.4 62.4,18.2 118.9,19.7 63.9,19.8 66.3,19.8 63.9,20.6 66.3,20.6 77.5,21.4 78.3,21.4 71.4,22.6 71.4,23.4 66.7,27.6 66.7,28.4
NetC2_1: C2.1 U1.7 | length 1.8
  Bottom Layer w0.5: U1.7 63.365,7.814 ccw(c64.356,7.814) 63.655,7.113 C2.1
NetC2_2: C2.2 L1.1 R3.1 U1.8 | length 21.1
  Top Layer w0.3: v1(57.5,6.9) 59.947,6.9 cw(c59.947,3.208) 62.558,5.818 63.672,4.705 cw(c60.465,1.498) 65,1.499 v1(65,0.724)
  Bottom Layer w0.5: v1(57.5,6.9) R3.1 ; U1.8 62.095,7.302 ccw(c63.086,7.302) 62.385,6.601 64.71,4.277 cw(c64.009,3.576) L1.1@65,3.576 ; v1(65,0.724) L1.1
NetC3_1: C3.1 C5.2 R3.2 | length 3.2
  Bottom Layer w0.5: C3.1 R3.2 C5.2
NetC4_2: C4.2 R2.2 R7.1 U2.3 | length 3.9
  Bottom Layer w0.4: R7.1@32.65,1.35 U2.3@32.65,2.825 ; U2.3 U2.3@32.65,2.825 ; R2.2 C4.2 U2.3@32.65,2.825
NetC5_1: C5.1 R4.2 R8.1 U1.5 | length 9.4
  Bottom Layer w0.2: R8.1 65.5,10 cw(c65.5,9.595) 65.905,9.595 U1.5
  Bottom Layer w0.4: R4.2 R8.1 C5.1
NetC9_1: C9.1 U3.6 | length 0.9
  Bottom Layer w0.5: C9.1 ccw(c64.65,24.072) 64.65,24.022 U3.6
NetC9_2: C9.2 L2.1 U3.5 | length 3.8
  Bottom Layer w0.5: L2.1 C9.2 U3.5
NetC11_1: C11.1 R14.2 U4.16 | length 28.4
  Top Layer w0.2: v2(28.125,7.13) 25.621,9.634 cw(c26.932,10.945) 25.078,10.945 25.078,17.331 cw(c26.932,17.331) 25.621,18.642 v2(31.179,24.2)
  Bottom Layer w0.2: U4.16 30.55,24.623 cw(c31.077,24.623) 30.705,24.996 31.882,26.174 ; v2(31.179,24.2) 32.343,25.364 ccw(c31.481,26.226) 32.7,26.226 32.7,26.5 ccw(c32.4,26.5) 32.4,26.8 C11.1 cw(c31.288,26.8) 31.898,26.189
  Bottom Layer w0.4: v2(28.125,7.13) R14.2
NetC12_1: C12.1 R13.2 U4.15 | length 97.5
  Top Layer w0.25: v2(30.416,26.8) 31.073,26.143 ccw(c32.384,27.454) 32.335,25.601 ccw(c32.384,27.454) 32.384,25.6 36.817,25.6 cw(c36.817,23.746) 38.128,25.057 43.939,19.247 ccw(c46.157,21.465) 46.157,18.328 50.216,18.328 cw(c50.216,13.641) 53.53,16.955 55.056,15.429 ccw(c57.976,18.35) 57.976,14.22 92.26,14.22 cw(c92.26,9.48) 97,9.48 97,8.881 ccw(c97.735,8.881) 97.735,8.146 101.181,8.146 cw(c101.181,-0.48) 107.28,5.62 109.6,3.3 ccw(c110.892,4.592) 110.892,2.765 v2(113.49,2.765)
  Bottom Layer w0.2: U4.15 30.05,24.687 cw(c30.604,24.687) 30.212,25.079 30.712,25.579 ccw(c30.137,26.154) 30.951,26.154 C12.1
  Bottom Layer w0.35: v2(30.416,26.8) C12.1
  Bottom Layer w0.4: v2(113.49,2.765) R13.2
NetC13_1: C13.1 R12.2 U4.14 | length 66.3
  Top Layer w0.25: v2(29.216,26.8) 29.974,26.042 ccw(c32.043,28.111) 32.043,25.185 33.416,25.185 cw(c33.416,18.986) 37.799,23.369 42.132,19.037 ccw(c46.147,23.052) 46.147,17.373 50.357,17.373 cw(c50.357,13.556) 53.056,16.255 54.416,14.895 ccw(c58.112,18.592) 58.113,13.364 65.258,13.364 cw(c65.258,11.245) 66.757,12.743 68.157,11.343 ccw(c69.468,12.654) 69.468,10.8 75.9,10.8 cw(c75.9,9.84) 76.86,9.84 76.86,7.403 cw(c75.006,7.403) 76.317,6.092 v2(72.99,2.765)
  Bottom Layer w0.2: U4.14 29.55,24.687 cw(c29.892,24.687) 29.65,24.929 ; 29.651,24.929 ccw(c29.409,25.171) 29.751,25.171 C13.1@29.751,26.8
  Bottom Layer w0.35: v2(29.216,26.8) C13.1@29.751,26.8
  Bottom Layer w0.4: v2(72.99,2.765) R12.2
NetC17_1: C17.1 U5.6 | length 0.9
  Bottom Layer w0.5: U5.6 73.922,23.45 cw(c73.972,23.45) C17.1
NetC17_2: C17.2 L3.1 U5.5 | length 3.8
  Bottom Layer w0.5: U5.5 C17.2 L3.1@72.972,26.4
NetC25_2: C25.2 R17.1 U4.21 | length 5.7
  Bottom Layer w0.2: U4.21 C25.2
  Bottom Layer w0.3: R17.1 C25.2
NetC26_2: C26.2 R16.1 U4.20 | length 6.7
  Bottom Layer w0.2: U4.20 33.258,20.8 cw(c33.258,20.65) 33.364,20.757 ccw(c33.47,20.863) 33.47,20.713 34.413,20.713 ccw(c34.413,21.3) 35.001,21.3 35.001,23.056 cw(c35.305,23.056) 35.305,23.36 C26.2
  Bottom Layer w0.4: C26.2 R16.1
NetC27_2: C27.2 U4.5 X1.1 | length 4.1
  Bottom Layer w0.28: C27.2@23.6,26.792 ccw(c24.819,26.792) 23.957,25.929 24.918,24.968 cw(c24.6,24.65) U4.5@25.05,24.65
  Bottom Layer w0.35: X1.1 22.6,26.8 C27.2
NetC28_2: C28.2 U4.6 X1.3 | length 10.6
  Bottom Layer w0.28: X1.3 20.643,28.643 cw(c21.505,27.781) 21.505,29 22.795,29 cw(c22.795,27.781) 23.657,28.643 24.059,28.241 ; 24.059,28.241 cw(c23.717,27.9) 24.2,27.9 24.2,26.798 ccw(c25.419,26.798) 24.557,25.936 25.296,25.196 cw(c24.6,24.55) 25.55,24.55 U4.6
  Bottom Layer w0.35: C28.2 19.8,27.8 X1.3
NetC31_1: C31.1 R21.1 R25.1 U4.8 | length 96.7
  Top Layer w0.25: v2(24.715,26.8) 24.935,26.58 ccw(c25.724,27.369) 25.724,26.253 ccw(c25.724,27.29) 26.456,26.556 27.775,27.875 cw(c28.801,26.849) 28.801,28.3 30.503,28.3 cw(c30.503,27.631) 30.976,28.104 32.13,26.95 ccw(c33.323,28.143) 33.323,26.456 36.817,26.456 cw(c36.817,23.746) 38.733,25.662 44.543,19.852 ccw(c46.157,21.465) 46.157,19.183 50.216,19.183 cw(c50.216,13.641) 54.135,17.56 55.661,16.034 ccw(c57.976,18.35) 57.976,15.075 92.452,15.075 cw(c92.452,2.588) 101.282,11.418 101.688,11.012 cw(c101.176,10.5) 101.9,10.5 cw(c101.176,10.5) 101.688,9.988 ; v1(98.3,8.73) 99.662,8.73 ccw(c99.662,10.584) 100.973,9.273 101.688,9.988
  Bottom Layer w0.2: C31.1 25.392,26.658 25.392,26.479 ccw(c25.824,26.479) 25.518,26.174 26.193,25.499 cw(c25.331,24.637) 26.55,24.637 U4.8
  Bottom Layer w0.35: v2(24.715,26.8) C31.1
  Bottom Layer w0.5: R21.1 R25.1 96.696,9.243 ccw(c97.209,9.243) 97.209,8.73 v1(98.3,8.73)
NetC32_1: C32.1 R22.1 R26.1 U4.9 | length 92.1
  Top Layer w0.25: v2(25.915,26.8) 27.229,28.114 cw(c28.742,26.601) 28.742,28.74 30.474,28.74 cw(c30.474,27.171) 31.584,28.281 32.566,27.298 ccw(c33.613,28.344) 33.613,26.865 ; 33.5,26.883 36.817,26.883 cw(c36.817,23.746) 39.036,25.964 44.846,20.154 ccw(c46.157,21.465) 46.157,19.611 50.216,19.611 cw(c50.216,13.641) 54.437,17.863 55.963,16.337 ccw(c57.976,18.35) 57.976,15.503 92.509,15.503 cw(c92.509,2.736) 101.536,11.764 101.946,11.354 cw(c101.093,10.5) 102.3,10.5 102.3,10.498 cw(c100.446,10.498) 101.757,9.187 v1(101.3,8.73)
  Bottom Layer w0.2: C32.1 26.45,26.327 ccw(c27.364,26.327) 26.718,25.68 26.811,25.588 cw(c26.232,25.009) 27.05,25.009 U4.9
  Bottom Layer w0.35: v2(25.915,26.8) C32.1
  Bottom Layer w0.5: R26.1@101.3,7.63 v1(101.3,8.73) ; R26.1 R22.1@103.256,7.63
NetC33_1: C33.1 R23.1 R27.1 U4.10 | length 85
  Top Layer w0.25: v2(27.985,26.8) cw(c29.192,25.593) 29.192,27.3 30.508,27.3 cw(c30.508,26.442) 31.115,27.049 31.593,26.571 ccw(c32.904,27.882) 32.904,26.028 36.817,26.028 cw(c36.817,23.746) 38.431,25.359 44.241,19.549 ccw(c46.157,21.465) 46.157,18.756 50.216,18.756 cw(c50.216,13.641) 53.833,17.258 55.358,15.732 ccw(c57.976,18.35) 57.976,14.647 92.331,14.647 cw(c92.331,3.078) 100.511,11.259 v1(101.3,10.47)
  Bottom Layer w0.2: C33.1 27.45,24.948 ccw(c27.643,24.948) 27.451,24.928 ccw(c27.643,24.948) 27.507,24.811 cw(c27.401,24.706) 27.546,24.741 cw(c27.401,24.706) U4.10@27.55,24.706 ; U4.10 U4.10@27.55,24.687
  Bottom Layer w0.35: C33.1 v2(27.985,26.8)
  Bottom Layer w0.5: R27.1@101.3,9.67 v1(101.3,10.47) ; R27.1 R23.1
NetC34_2: C34.2 R24.2 U4.7 | length 8.3
  Bottom Layer w0.28: R24.2 22.029,23.457 ccw(c22.891,24.319) 22.891,23.1 25.631,23.1 ccw(c25.631,23.519) 26.05,23.519 U4.7
  Bottom Layer w0.3: C34.2 R24.2
NetC37_2: C37.2 U4.31 | length 1.1
  Bottom Layer w0.25: U4.31 C37.2@33.501,15.3
NetC38_2: C38.2 U4.47 | length 2.5
  Bottom Layer w0.28: C38.2 23.55,10.7 U4.47
NetC39_2: C39.2 C40.2 L4.2 U4.12 | length 14.7
  Bottom Layer w0.25: U4.12 28.55,23.435 ccw(c29.241,23.435) 29.241,22.744 30.502,22.744 ccw(c30.502,24.777) 31.939,23.339 33.278,24.678 cw(c34.296,23.661) C39.2@34.296,25.1 ; C39.2 cw(c35.234,24.376) 35.234,25.4 38.1,25.4 cw(c38.1,24.7) 38.8,24.7 C40.2@38.8,23.4
  Bottom Layer w0.35: L4.2 C40.2
NetJ1_2: J1.2 R1.2 | length 137.8
  Top Layer w0.2: v2(24.1,6.165) 23.968,6.297 cw(c24.791,7.121) 23.626,7.121 23.626,31.622 cw(c34.307,31.622) 26.755,39.174 27.503,39.923 cw(c33.057,34.369) 33.057,42.224 33.099,42.224 cw(c33.099,35.366) 37.948,40.215 56.966,21.197 ccw(c61.74,25.971) 61.74,19.22 95.615,19.22 cw(c95.615,14.791) 98.747,17.923 98.936,17.734 ccw(c100.533,19.33) 100.533,17.072 114.927,17.072 ccw(c114.927,18.021) v1(115.598,17.35)
  Bottom Layer w0.35: v1@115.598,17.35 ccw(c116.08,17.833) 116.08,17.15 J1.2
  Bottom Layer w0.4: v2(24.1,6.165) ccw(c24.1,7.565) 25.501,7.565 R1.2
NetJ1_3: J1.3 R5.2 | length 134.1
  Top Layer w0.2: v2(24.1,7.165) 24.1,31.622 cw(c34.307,31.622) 27.09,38.84 27.838,39.588 cw(c33.057,34.369) 33.057,41.75 33.099,41.75 cw(c33.099,35.366) 37.613,39.88 56.631,20.863 ccw(c61.74,25.971) 61.74,18.747 95.615,18.747 cw(c95.615,14.791) 98.412,17.588 98.601,17.399 ccw(c100.611,19.409) 100.611,16.566 114.955,16.566 cw(c114.955,15.658) v1(115.598,16.3)
  Bottom Layer w0.35: v1@115.598,16.3 cw(c116.08,15.817) 116.08,16.5 J1.3
  Bottom Layer w0.4: v2(24.1,7.165) R5.2
NetJ4_1: J4.1 U6.7 | length 7.3
  Bottom Layer w0.2: U6.7 3.825,42.825 cw(c4.5,42.825) 4.5,43.5 5.149,43.5 cw(c5.149,41.493) 6.568,42.912 J4.1
NetJ4_2: J4.2 U6.6 | length 8.7
  Bottom Layer w0.2: U6.6 3.175,43.175 cw(c4.5,43.175) 4.5,44.5 5.149,44.5 ccw(c5.149,46.507) 6.568,45.088 J4.2
NetR6_1: R6.1 U1.4 | length 3.5
  Bottom Layer w0.5: U1.4 R6.1
NetR9_1: R9.1 R17.2 TP2.1 | length 19.5
  Bottom Layer w0.3: TP2.1 ccw(c30.476,12.736) 30.476,8.4 35.03,8.4 ccw(c35.03,9.67) 36.3,9.67 36.3,15.795 cw(c37.519,15.795) 36.657,16.657 36.9,16.9 ccw(c36.175,17.625) R17.2@37.2,17.625
  Bottom Layer w0.4: R17.2@37.2,17.625 R17.2 R9.1
NetR10_1: R10.1 R16.2 TP1.1 | length 38.8
  Top Layer w0.25: v2(36.465,23.4) 40.671,19.195 ccw(c46.144,24.668) 46.144,16.927 50.01,16.927 cw(c50.01,12.924) 52.841,15.755 54.001,14.595 ccw(c58.006,18.6) 58.006,12.936 65.021,12.936 cw(c65.021,10.902) 66.459,12.341 67.367,11.433 cw(c66.056,10.122) 67.91,10.122 TP1.1
  Bottom Layer w0.4: R10.1 R16.2
  Bottom Layer w0.5: v2(36.465,23.4) R10.1
NetR18_1: R18.1 R19.2 U5.1 | length 5.5
  Bottom Layer w0.25: U5.1 73.922,19.446 ccw(c74.818,19.446) 74.818,18.55 R18.1 77.5,17.35 R19.2
SWCLK: J3.1 U4.49 | length 1.8
  Bottom Layer w0.25: J3.1@19.4,14.8 U4.49
SWDIO: J3.2 U4.46 | length 6.1
  Bottom Layer w0.25: J3.2 20.642,13.502 cw(c21.602,12.542) 21.602,13.9 23.746,13.9 cw(c23.746,13.595) 24.05,13.595 U4.46
U: J2.2 R21.2 | length 11.9
  Bottom Layer w0.5: R21.2 107.722,11.6 cw(c107.722,8.465) 109.938,10.682 J2.2
U_H: J5.2 U4.41 | length 7.6
  Bottom Layer w0.25: U4.41 26.55,12.45 ccw(c27,12.45) 27,12 28.793,12 cw(c28.793,10.293) 30,11.5 31.22,10.28 ccw(c32.5,11.561) 32.408,9.752 ccw(c32.5,11.561) J5.2@32.5,9.75 ; J5.2@32.455,9.705 J5.2
U_Iout: J5.1 R14.1 | length 1.9
  Bottom Layer w0.4: R14.1 J5.1
U_L: J5.4 U4.34 | length 6.7
  Bottom Layer w0.25: U4.34 30.05,12.363 ccw(c30.61,12.363) 30.214,11.967 30.917,11.265 ccw(c31.902,12.25) 31.902,10.857 33.125,10.857 cw(c33.125,9.003) 34.436,10.314 J5.4@35,9.75 ; J5.4@34.975,9.725 J5.4
V: J2.3 R22.2 | length 2.1
  Bottom Layer w0.8: R22.2 J2.3
V_H: J6.2 U4.42 | length 50.4
  Top Layer w0.25: v2(26.05,13.91) 28.43,13.91 ccw(c28.43,14.787) 29.05,14.167 cw(c29.613,13.605) 29.613,14.4 52.006,14.4 cw(c52.006,10.841) 54.522,13.358 57.236,10.643 ccw(c58.548,11.954) 58.548,10.1 62.9,10.1 cw(c62.9,8.349) 64.138,9.587 64.625,9.1 ccw(c65.832,10.307) 65.832,8.6 71.152,8.6 ccw(c71.152,10.454) 72.463,9.143 J6.2
  Bottom Layer w0.25: U4.42 v2(26.05,13.91)
V_Iout: J6.1 R12.1 | length 1.9
  Bottom Layer w0.4: R12.1 J6.1
V_L: J6.4 U4.35 | length 49.6
  Top Layer w0.25: v2(29.55,13.91) 51.948,13.91 cw(c51.948,11.154) 53.897,13.103 56.86,10.14 ccw(c58.172,11.451) 58.172,9.597 62.533,9.597 cw(c62.533,7.901) 63.731,9.101 64.388,8.443 ccw(c65.699,9.754) 65.699,7.9 71.66,7.9 ccw(c71.66,8.754) 72.263,8.149 ; 72.263,8.15 cw(c72.867,7.546) 72.867,8.4 73.492,8.4 ccw(c73.492,10.254) 74.803,8.943 J6.4
  Bottom Layer w0.25: U4.35 v2(29.55,13.91)
Vb: C1.2 J2.4 R15.1 U1.2 U1.3 | length 56.8
  Bottom Layer w0.4: C1.2@64.457,17.823 cw(c65.394,17.823) 65.394,18.759 70.646,18.759 cw(c70.646,9.39) 77.272,16.015 78.247,15.04 ccw(c82.689,19.482) 82.689,13.2 107.959,13.2 cw(c107.959,8.997) 110.931,11.969 111.584,11.316 cw(c110.05,9.781) 112.22,9.781 112.22,9.506 cw(c109.55,9.506) 111.438,7.618 J2.4
  Bottom Layer w0.8: R15.1 J2.4
VB_SNS: C10.1 R11.1 R15.2 U2.1 U4.17 | length 127.3
  Top Layer w0.2: v2(33.585,4.75) 31.418,4.75 ccw(c31.418,2.896) 30.107,4.207 28.573,2.673 cw(c28.103,3.144) 28.103,2.479 cw(c28.103,3.082) 27.5,3.082 27.5,6.341 ccw(c25.646,6.341) 26.957,7.652 25.189,9.42 cw(c26.5,10.731) 24.646,10.731 24.646,17.719 cw(c26.5,17.719) 25.189,19.03 30.665,24.506 cw(c31.229,23.941) 31.229,24.739 33.208,24.739 cw(c33.208,22.898) v2(34.51,24.2)
  Top Layer w0.25: v2(38.2,24.2) 43.373,19.027 ccw(c46.094,21.748) 46.094,17.9 50.216,17.9 cw(c50.216,13.641) 53.228,16.653 54.753,15.127 ccw(c57.976,18.35) 57.976,13.792 92.187,13.792 cw(c92.187,9.438) 96.541,9.438 96.541,8.84 ccw(c97.596,8.84) 97.596,7.784 101.124,7.784 cw(c101.124,0.295) 106.419,5.591 v1(109.234,2.776)
  Mid Layer 1 w0.25: v2(34.51,24.2) v2(38.2,24.2)
  Bottom Layer w0.25: U4.17 32.895,22.3 ccw(c32.895,22.605) 33.2,22.605 33.2,23.784 cw(c33.616,23.784) 33.616,24.2 C10.1 v2(34.51,24.2)
  Bottom Layer w0.35: U2.1 v2(33.585,4.75)
  Bottom Layer w0.5: v1(109.234,2.776) R11.1 R15.2
W: J2.1 R23.2 | length 2.1
  Bottom Layer w0.8: R23.2 J2.1
W_H: J7.2 U4.43 | length 93.6
  Top Layer w0.25: v2(25.55,14.41) 26.942,14.41 ccw(c26.942,16.264) 28.253,14.953 29.071,15.771 cw(c30.382,14.46) 30.382,16.314 44.603,16.314 cw(c44.603,14.46) 45.914,15.771 v1(46.141,15.544) ; v1(58.041,16.4) ccw(c58.582,16.941) 58.582,16.176 69.416,16.176 ccw(c69.416,18.01) 70.713,16.713 71.25,17.25 ; 71.251,17.251 cw(c72.095,16.405) 72.095,17.6 92.945,17.6 cw(c92.945,7.81) 99.867,14.733 101.678,12.922 ccw(c106.318,17.562) 106.318,11 110.698,11 cw(c110.698,7.471) 113.194,9.966 J7.2
  Mid Layer 1 w0.25: v1(46.141,15.544) ccw(c46.73,16.134) 46.73,15.3 55.767,15.3 ccw(c55.767,18.135) 57.771,16.13 v1(58.041,16.4)
  Bottom Layer w0.25: U4.43 v2(25.55,14.41)
W_Iout: J7.1 R13.1 | length 1.9
  Bottom Layer w0.4: R13.1 J7.1
W_L: J7.4 U4.36 | length 93
  Top Layer w0.25: v2(29.05,14.91) 46.19,14.91 ccw(c46.19,15.72) 47,15.72 v1(47,15.944) ; v1(58.9,16.8) ccw(c59.383,17.283) 59.383,16.6 69.232,16.6 ccw(c69.232,18.454) 70.543,17.143 71,17.6 cw(c71.966,16.634) 71.966,18 93.145,18 cw(c93.145,8.21) 100.067,15.133 102.022,13.178 ccw(c106.314,17.469) 106.314,11.4 112.014,11.4 cw(c112.014,5.88) 115.917,9.783 J7.4
  Mid Layer 1 w0.25: v1(47,15.944) 55.876,15.944 ccw(c55.876,17.798) 57.187,16.487 57.488,16.788 cw(c58,16.276) 58,17 58.417,17 cw(c58.417,16.317) v1(58.9,16.8)
  Bottom Layer w0.25: U4.36 v2(29.05,14.91)
pads on no net: J1. U4.2 U4.3 U4.4 U4.11 U4.22 U4.23 U4.24 U4.25 U4.26 U4.27 U4.28 U4.29 U4.30 U4.37 U4.38 U4.39 U4.40 U4.50 U4.51 U4.52 U4.53 U4.54 U4.55 U4.56 U4.57 U4.58 U4.59

## Polygon pours and split planes (outlines as drawn)
GND on Bottom Layer "NONET_L02_P-001" (solid, remove dead copper, pour order 3): 42.75,28.396 ccw(c40.896,28.396) 40.896,30.25 35.25,30.25 ccw(c35.232,28.453) 35.232,30.25 19.354,30.25 ccw(c19.354,28.396) 17.5,28.396 17.5,-1.25 42.75,-1.25
GND on Bottom Layer "NONET_L02_P-001" (solid, remove dead copper, pour order 4): -0.75,40.25 4.5,40.25 cw(c4.5,39.75) 5,39.75 5,34.426 cw(c4.564,34.426) 4.564,33.99 -0.75,33.99
GND on Bottom Layer "NONET_L02_P-001" (solid, remove dead copper, pour order 2): 114.04,14.2 114.04,20.481 cw(c115.259,20.481) 115.259,21.7 124.2,21.7 124.2,5.6 121.019,5.6 cw(c121.019,6.819) 119.8,6.819 119.8,7.935 ccw(c118.581,7.935) 119.443,8.797 114.04,14.2
GND on Bottom Layer "NONET_L02_P-001" (solid, remove dead copper, pour order 0): 60.7,10.3 cw(c60.7,11.1) 59.9,11.1 59.9,20.06 cw(c62.44,20.06) 62.44,22.6 65.8,22.6 ccw(c65.8,22.9) 66.1,22.9 66.1,27.9 cw(c67.3,27.9) 67.3,29.1 70.2,29.1 cw(c70.2,27.5) 71.8,27.5 71.8,25.583 ccw(c72.483,25.583) 72,25.1 72.359,24.741 cw(c72.017,24.4) 72.5,24.4 72.5,22.3 ccw(c72.8,22.3) 72.8,22 77.9,22 cw(c77.9,20.9) 79,20.9 79,18.1 cw(c78.5,18.1) 78.5,17.6 70.2,17.6 ccw(c70.2,16.7) 69.3,16.7 69.3,11.4 cw(c68.2,11.4) 68.2,10.3
GND on Mid Layer 1 "NONET_L02_P-001" (solid, remove dead copper, pour order 5): -6.75,60.75 -6.75,-4.75 131.5,-4.75 131.5,60.75
3V3 on Mid Layer 1 "NONET_L02_P-001" (solid, remove dead copper, pour order 1): 31.75,-3.4 31.75,5.732 cw(c33.604,5.732) 32.293,7.043 46.457,21.207 cw(c47.768,19.896) 47.768,21.75 59.982,21.75 ccw(c59.982,23.604) 61.293,22.293 64.207,25.207 ccw(c62.896,26.518) 64.75,26.518 64.75,29.896 ccw(c62.896,29.896) 62.896,31.75 13.268,31.75 cw(c13.268,33.604) 11.957,32.293 3.893,40.357 ccw(c2.582,39.046) 2.582,40.9 -2,40.9 -2,-3.4
GND on Mid Layer 2 (split plane): 483 vertices, not listed, extent 0.51,0.51 122.49,59.49

## Keep-outs
Keep-Out Layer:
  circle w0: c114,35 r6
  circle w0: c73.5,35 r6
  circle w0: c33,35 r6
  lines w0: 0,12 8.5,12 cw(c8.5,6) 14.5,6 14.5,0 43,0 43,6 cw(c49,6) 55,6 55,0 83.5,0 83.5,6 cw(c89.5,6) 95.5,6 95.5,0 123,0 123,60 95.5,60 95.5,54 cw(c89.5,54) 83.5,54 83.5,60 55,60 55,54 cw(c49,54) 43,54 43,60 14.5,60 14.5,54 cw(c8.5,54) 8.5,48 0,48 0,12

## Other copper
Top Layer:
  rectangle net 15V: 80.579,8.934 82.238,10.402
Mid Layer 1:
  region net 15V: 68.4,20.083 ccw(c69.807,20.083) 68.812,19.088 70.846,17.054 cw(c69.993,16.2) 71.2,16.2 ccw(c71.9,16.2) 71.9,15.5 72.9,15.5 ccw(c72.9,16.2) 73.6,16.2 73.6,17 ccw(c72.9,17) 72.9,17.7 72.852,17.7 cw(c72.852,20.24) 71.056,18.444 69.787,19.713 cw(c70.479,20.405) 69.5,20.405 69.5,20.8 ccw(c69.1,20.8) 69.1,21.2 68.8,21.2 ccw(c68.8,20.8) 68.4,20.8
Bottom Layer:
  region net 3V3: 65.4,27.3 63.9,27.3 cw(c63.9,27.6) 63.6,27.6 63.6,28.4 cw(c63.9,28.4) 63.9,28.7 65.4,28.7
  region net Vb: 63.2,13.5 ccw(c63.4,13.5) 63.4,13.3 64.619,13.3 ccw(c64.619,13.481) 64.8,13.481 64.8,17.8 63.2,17.8
  region net 15V: 67.599,23.3 ccw(c67.599,22.801) 67.1,22.801 67.1,19.6 ccw(c67.4,19.6) 67.4,19.3 72.7,19.3 ccw(c72.7,19.9) 73.3,19.9 73.3,20.524 ccw(c72.724,20.524) 72.724,21.1 69.2,21.1 cw(c69.2,21.6) 68.7,21.6 68.7,22.8 ccw(c68.2,22.8) 68.2,23.3
  region net 15V: 69.6,17.3 cw(c70.6,17.3) 70.6,18.3 cw(c70.601,9.61) 76.746,15.754 80.503,11.997 cw(c78.581,10.074) 81.3,10.073 81.3,9.6 cw(c80.6,9.6) 80.6,8.9 cw(c80.6,9.624) 80.088,9.112 78.7,10.5 ccw(c77.976,9.776) 77.976,10.8 73.2,10.8 cw(c73.2,12.2) 71.8,12.2 71.8,16.86 ccw(c71.56,16.86) 71.56,17.1 71.436,17.1 ccw(c71.436,16.864) 71.2,16.864 71.2,15.6 69.6,15.6
Multi-Layer:
  pour cut-out: 22.8,60.25 22.8,56.75 cw(c19.5,56.75) 19.5,53.45 19.5,60.25
  pour cut-out: 16.2,60.25 16.2,56.75 ccw(c19.5,56.75) 19.5,53.45 19.5,60.25
  pour cut-out: 56.7,60 56.7,56.5 ccw(c60,56.5) 60,53.2 60,60
  pour cut-out: 63.3,60 63.3,56.5 cw(c60,56.5) 60,53.2 60,60
  pour cut-out: 103.8,60 103.8,56.5 cw(c100.5,56.5) 100.5,53.2 100.5,60
  pour cut-out: 97.2,60 97.2,56.5 ccw(c100.5,56.5) 100.5,53.2 100.5,60
  pour cut-out: 97.2,0 97.2,3.5 cw(c100.5,3.5) 100.5,6.8 100.5,0
  pour cut-out: 103.8,0 103.8,3.5 ccw(c100.5,3.5) 100.5,6.8 100.5,0
  pour cut-out: 56.7,0 56.7,3.5 cw(c60,3.5) 60,6.8 60,0
  pour cut-out: 63.3,0 63.3,3.5 ccw(c60,3.5) 60,6.8 60,0
  pour cut-out: 22.8,0 22.8,3.5 ccw(c19.5,3.5) 19.5,6.8 19.5,0
  pour cut-out: 16.2,0 16.2,3.5 cw(c19.5,3.5) 19.5,6.8 19.5,0